# Altium PCB amps.PcbDoc
Units mm, origin at the board's own origin, x right, y up, seen from the top; angles counter-clockwise.
Board outline 153.8 x 149.61 mm, 2 copper layers (Top Layer, Bottom Layer); 97 components, 90 nets, 317 pads, 0 vias.
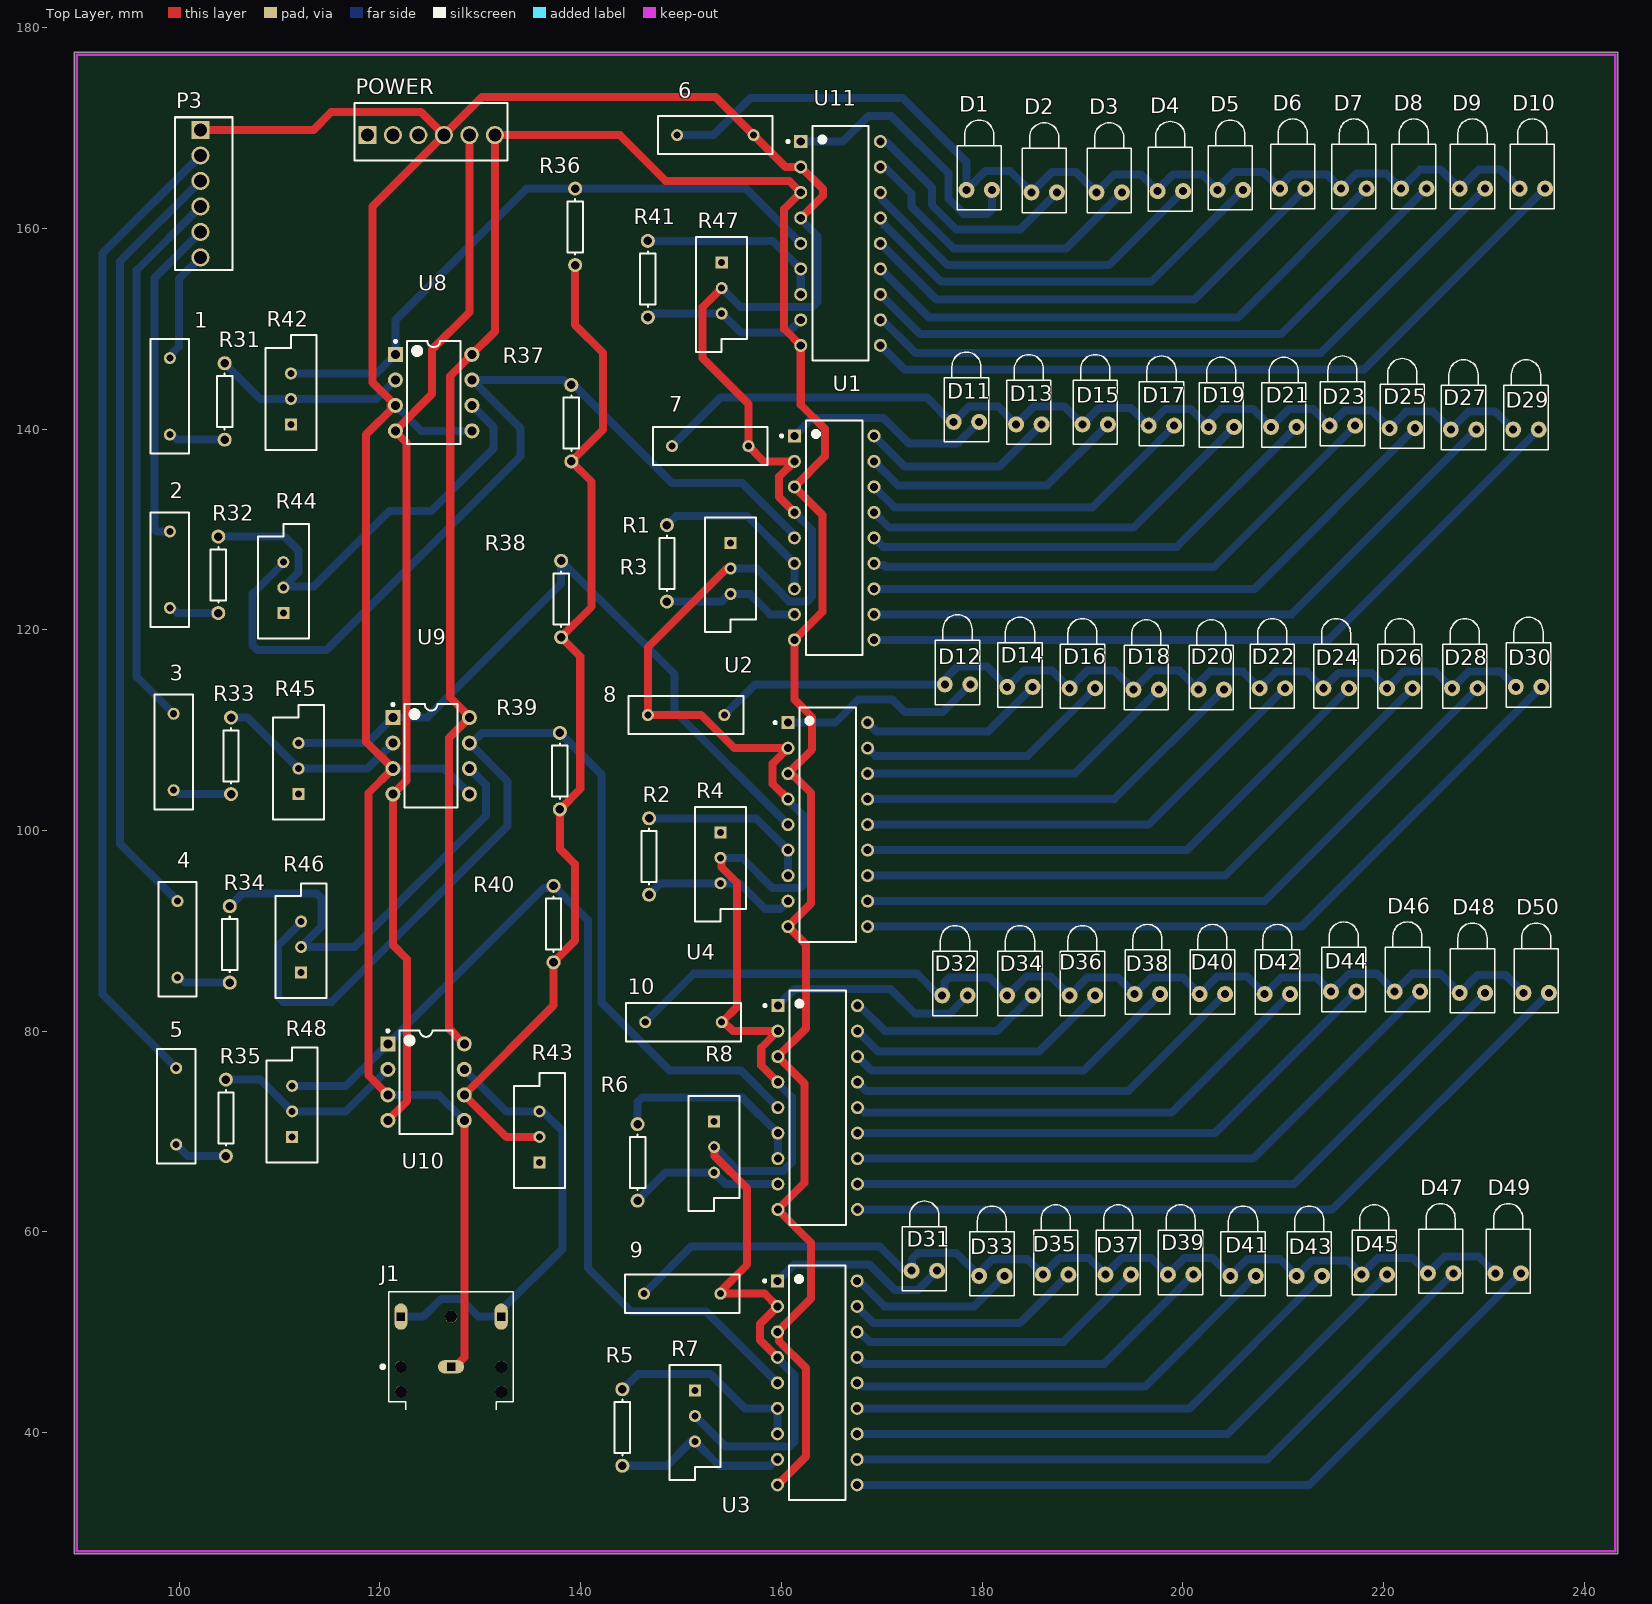
[diagram p0: Top Layer view]
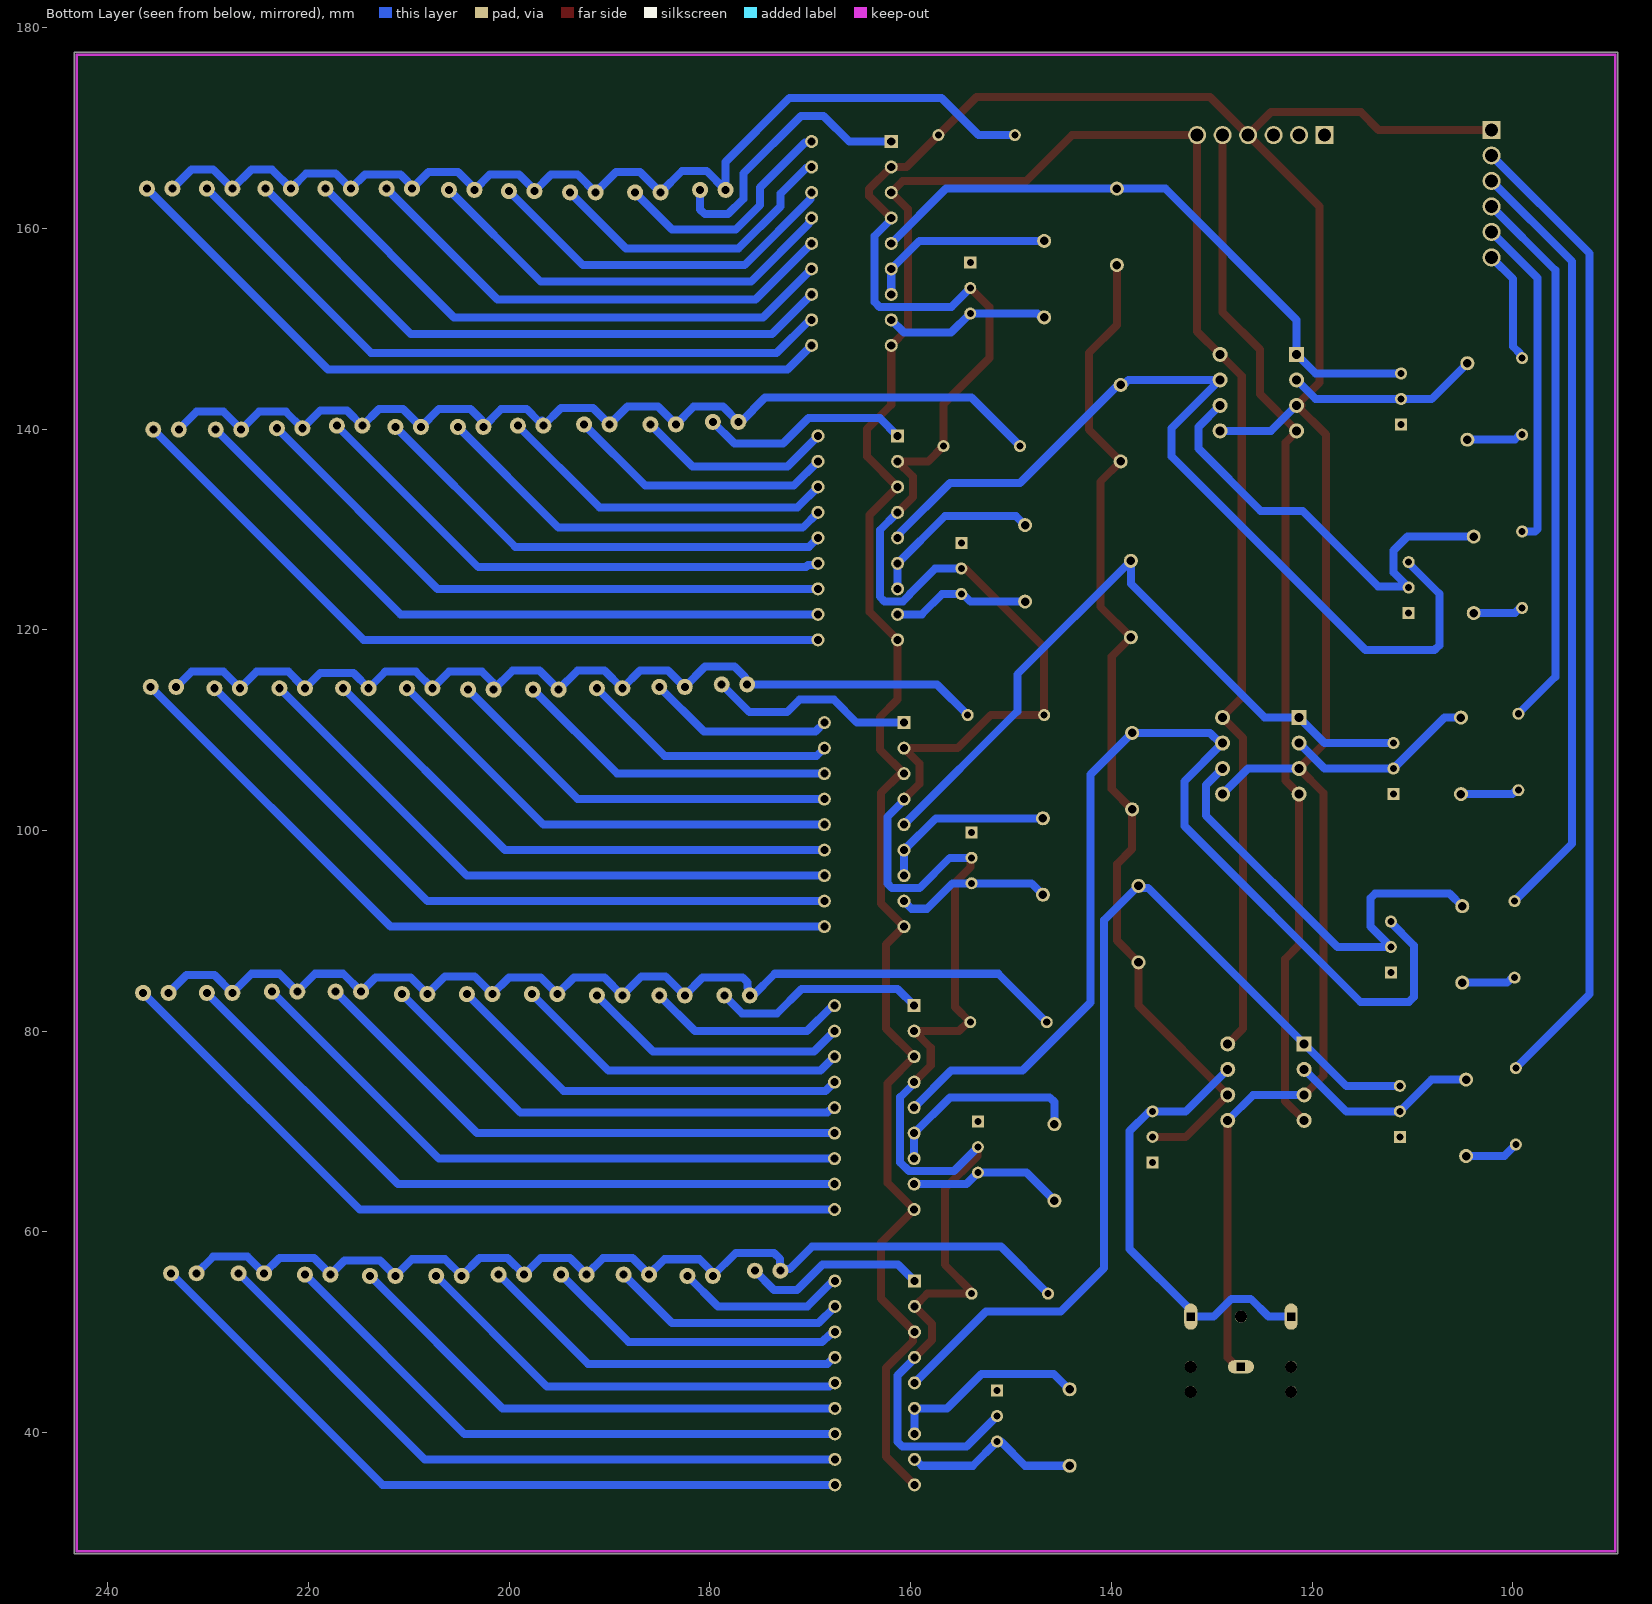
[diagram p1: Bottom Layer view, seen from below]

## Layer stack, top to bottom
Top Solder: solder mask 0.0102, Solder Resist, Dk 3.5
Top Layer: signal copper 0.0356
Dielectric 1: dielectric 0.32, FR-4, Dk 4.8
Bottom Layer: signal copper 0.0356
Bottom Solder: solder mask 0.0102, Solder Resist, Dk 3.5

## Board outline
89.535,27.94 243.332,27.94 243.332,177.546 89.535,177.546

## Design rules (kind name [scope] priority, off if disabled: settings)
BoardOutlineClearance [All] p1: gap=0.2 ignorepadtopadclearanceinfootprint=FALSE except(0.4: Arc-SplitBarrior Arc-SplitContinuation Track-SplitBarrior Track-SplitContinuation SMDPad-SplitBarrior SMDPad-SplitContinuation THPad-SplitBarrior THPad-SplitContinuation Via-SplitBarrior Via-SplitContinuation Fill-SplitBarrior Fill-SplitContinuation Poly-SplitBarrior Poly-SplitContinuation Region-SplitBarrior Region-SplitContinuation Text-SplitBarrior Text-SplitContinuation)
Clearance "Clearance Bottom Layer" [OnLayer('Bottom Layer')] p1: gap=0.203 ignorepadtopadclearanceinfootprint=TRUE except(0.254: Arc-Text Track-Text SMDPad-Text THPad-Text Via-Text Fill-Text Poly-Text Region-Text Text-Text)
Clearance "Clearance Top Layer" [OnLayer('Top Layer')] p2: gap=0.203 ignorepadtopadclearanceinfootprint=TRUE except(0.254: Arc-Text Track-Text SMDPad-Text THPad-Text Via-Text Fill-Text Poly-Text Region-Text Text-Text)
Clearance [All] p3: gap=0.2 ignorepadtopadclearanceinfootprint=FALSE except(0.089: Arc-Arc Arc-Track Arc-SMDPad Track-Track Track-SMDPad SMDPad-SMDPad; 0.127: Arc-Via Track-Via SMDPad-Via THPad-Via Via-Via; 0.254: Arc-Text Track-Text SMDPad-Text THPad-Text Via-Text Fill-Text Poly-Text Region-Text Text-Text)
HoleSize [All] p1: absolutevalues=TRUE maxlimit=6.3 minlimit=0.2 maxpercent=80.000 minpercent=20.000
MinimumAnnularRing [All] p1: minimumring=0.076
MinimumSolderMaskSliver [All] p1: minsoldermaskwidth=0.1
PolygonConnect PolygonConnect_1 [All] p1: thpad.connectstyle=Relief thpad.reliefconductorwidth=0.508 thpad.reliefentries=4 thpad.polygonreliefangle="90 Angle" thpad.airgapwidth=0.254 smdpad.connectstyle=Relief smdpad.reliefconductorwidth=0.508 smdpad.reliefentries=4 smdpad.polygonreliefangle="90 Angle" smdpad.airgapwidth=0.254 via.connectstyle=Direct via.reliefconductorwidth=0.508 via.reliefentries=4 via.polygonreliefangle="90 Angle" via.airgapwidth=0.254
RoomDefinition next [InComponentClass('next')] p1: confinementstyle=ConfineIn formatcopy=TRUE lockcomponents=FALSE outline 253.746,0 241.935,0 253.746,0
RoutingCorners [All] p1: cornerstyle=Round minsetback=2.54 maxsetback=2.54
RoutingVias [All] p1: holewidth=0.5 width=1 viastyle="Through Hole" minholewidth=0.2 minwidth=0.45 maxholewidth=1 maxwidth=2
SilkToSilkClearance [All] p1: silktosilkclearance=0.1
SilkToSolderMaskClearance [IsPad] p1: minsilkscreentomaskgap=0.1 clearancetoexposedcopper=TRUE
SolderMaskExpansion [All] p1: expansion=0.102 istentingtop=FALSE
Width [All] p1: maxlimit=1 minlimit=0.8 preferedwidth=0.9
25 further rules are at their usual default settings.

## Components (designator, comment, footprint, x,y, rotation, side; value= is the part's Value field where it differs from the comment)
1 "C1" RAD-0.3 99.06,143.256 r90 top value=10uF
2 "C1" RAD-0.3 99.06,125.984 r90 top value=10uF
3 "C1" RAD-0.3 99.441,107.823 r90 top value=10uF
4 "C1" RAD-0.3 99.822,89.154 r90 top value=10uF
5 "C1" RAD-0.3 99.695,72.517 r90 top value=10uF
6 "C1" RAD-0.3 153.416,169.291 r180 top value=100nF
7 "C1" RAD-0.3 152.908,138.303 r180 top value=100nF
8 "C1" RAD-0.3 150.495,111.506 r0 top value=100nF
9 "C1" RAD-0.3 150.114,53.848 r180 top value=100nF
10 "C1" RAD-0.3 150.241,80.899 r180 top value=100nF
D1 "LED1" LED-1 179.705,163.83 r90 top
D2 "LED1" LED-1 186.182,163.576 r90 top
D3 "LED1" LED-1 192.659,163.576 r90 top
D4 "LED1" LED-1 198.755,163.703 r90 top
D5 "LED1" LED-1 204.724,163.83 r90 top
D6 "LED1" LED-1 210.947,163.957 r90 top
D7 "LED1" LED-1 217.043,163.957 r90 top
D8 "LED1" LED-1 223.012,163.957 r90 top
D9 "LED1" LED-1 228.854,163.957 r90 top
D10 "LED1" LED-1 234.823,163.957 r90 top
D11 "LED1" LED-1 178.435,140.716 r90 top
D12 "LED1" LED-1 177.546,114.554 r90 top
D13 "LED1" LED-1 184.658,140.462 r90 top
D14 "LED1" LED-1 183.769,114.3 r90 top
D15 "LED1" LED-1 191.262,140.462 r90 top
D16 "LED1" LED-1 189.992,114.173 r90 top
D17 "LED1" LED-1 197.866,140.335 r90 top
D18 "LED1" LED-1 196.342,114.046 r90 top
D19 "LED1" LED-1 203.835,140.208 r90 top
D20 "LED1" LED-1 202.819,114.046 r90 top
D21 "LED1" LED-1 210.058,140.208 r90 top
D22 "LED1" LED-1 208.915,114.173 r90 top
D23 "LED1" LED-1 215.9,140.335 r90 top
D24 "LED1" LED-1 215.265,114.173 r90 top
D25 "LED1" LED-1 221.869,140.081 r90 top
D26 "LED1" LED-1 221.615,114.173 r90 top
D27 "LED1" LED-1 227.965,139.954 r90 top
D28 "LED1" LED-1 228.092,114.173 r90 top
D29 "LED1" LED-1 234.188,139.954 r90 top
D30 "LED1" LED-1 234.442,114.3 r90 top
D31 "LED1" LED-1 174.244,56.134 r90 top
D32 "LED1" LED-1 177.292,83.566 r90 top
D33 "LED1" LED-1 180.975,55.626 r90 top
D34 "LED1" LED-1 183.769,83.566 r90 top
D35 "LED1" LED-1 187.325,55.753 r90 top
D36 "LED1" LED-1 189.992,83.566 r90 top
D37 "LED1" LED-1 193.548,55.753 r90 top
D38 "LED1" LED-1 196.469,83.693 r90 top
D39 "LED1" LED-1 199.771,55.753 r90 top
D40 "LED1" LED-1 202.946,83.693 r90 top
D41 "LED1" LED-1 205.994,55.626 r90 top
D42 "LED1" LED-1 209.423,83.693 r90 top
D43 "LED1" LED-1 212.598,55.626 r90 top
D44 "LED1" LED-1 216.027,83.947 r90 top
D45 "LED1" LED-1 219.075,55.753 r90 top
D46 "LED1" LED-1 222.377,83.947 r90 top
D47 "LED1" LED-1 225.679,55.88 r90 top
D48 "LED1" LED-1 228.854,83.82 r90 top
D49 "LED1" LED-1 232.41,55.88 r90 top
D50 "LED1" LED-1 235.204,83.82 r90 top
J1 "SJ1-3523N" CUI_SJ1-3523N 127.08,46.562 r90 top
P3 "640456-6" TECO-640456-6_V 102.108,169.799 r270 top
POWER "640456-6" TECO-640456-6_V 118.745,169.291 r0 top
R1 "" AXIAL-0.3 148.59,126.619 r270 top value=1.21K
R2 "" AXIAL-0.3 146.812,97.409 r270 top value=1.21K
R3 "RPot" VR5 154.94,126.111 r270 top value=1K
R4 "RPot" VR5 153.924,97.282 r270 top value=1K
R5 "" AXIAL-0.3 144.145,40.513 r270 top value=1.21K
R6 "" AXIAL-0.3 145.669,66.929 r270 top value=1.21K
R7 "RPot" VR5 151.384,41.656 r270 top value=1K
R8 "RPot" VR5 153.289,68.453 r270 top value=1K
R31 "" AXIAL-0.3 104.521,142.748 r270 top value=15K
R32 "" AXIAL-0.3 103.886,125.476 r270 top value=15K
R33 "" AXIAL-0.3 105.156,107.442 r270 top value=15K
R34 "" AXIAL-0.3 105.029,88.646 r270 top value=15K
R35 "" AXIAL-0.3 104.648,71.374 r270 top value=15K
R36 "" AXIAL-0.3 139.446,160.147 r90 top value=100K
R37 "" AXIAL-0.3 139.065,140.589 r90 top value=100K
R38 "" AXIAL-0.3 138.049,123.063 r90 top value=100K
R39 "" AXIAL-0.3 137.922,105.918 r90 top value=100K
R40 "" AXIAL-0.3 137.287,90.678 r90 top value=100K
R41 "" AXIAL-0.3 146.685,154.94 r270 top value=1.21K
R42 "RPot" VR5 111.125,143.002 r90 top value=1K
R43 "RPot" VR5 135.89,69.469 r90 top value=1K
R44 "RPot" VR5 110.363,124.206 r90 top value=1K
R45 "RPot" VR5 111.887,106.172 r90 top value=1K
R46 "RPot" VR5 112.141,88.392 r90 top value=1K
R47 "RPot" VR5 154.051,154.051 r270 top value=1K
R48 "RPot" VR5 111.252,72.009 r90 top value=1K
U1 "LM3914N-1" FP-NFK0018A-MFG 165.259,129.159 r0 top
U2 "LM3914N-1" FP-NFK0018A-MFG 164.624,100.584 r0 top
U3 "LM3914N-1" FP-NFK0018A-MFG 163.576,44.958 r0 top
U4 "LM3914N-1" FP-NFK0018A-MFG 163.608,72.39 r0 top
U8 "LM4562NA" N08E 125.349,143.637 r0 top
U9 "LM4562NA" N08E 125.095,107.442 r0 top
U10 "LM4562NA" N08E 124.587,74.93 r0 top
U11 "LM3914N-1" FP-NFK0018A-MFG 165.894,158.496 r0 top

## Footprints (in the part's own frame and the unit in brackets; to place one, negate y for a bottom-side part, rotate by r counter-clockwise, add the part's x,y. Pads: shape width x height; smd on the part's side, far side on the other; paste and mask are expansions set on the pad)
AXIAL-0.3 [mm] "Axial Device, Thru-Hole; 2 Leads; 0.3 in Pin Spacing"
  round 1.4 hole 0.85: 1(-3.81,0) 2(3.81,0)
  silkscreen extent -2.77,-0.76 2.77,0.76
CUI_SJ1-3523N [mm]
  oval 1.308x2.616 hole 0.8 square: 1(0,0)
  oval 2.616x1.308 hole 0.8 square: 2(5,-5) 3(5,5)
  round 1.2 hole 1.2 unplated: ""(-2.5,5) ""(-2.5,-5) ""(0,5) ""(0,-5) ""(5,0)
  silkscreen extent -4.3,-6.2 7.5,6.97
FP-NFK0018A-MFG [mm]
  rect 1.3x1.3 hole 0.8 paste-1000 mask+0: 1(-3.969,10.16)
  round 1.3 hole 0.8 paste-1000 mask+0: 2(-3.969,7.62) 3(-3.969,5.08) 4(-3.969,2.54) 5(-3.969,0) 6(-3.969,-2.54) 7(-3.969,-5.08) 8(-3.969,-7.62) 9(-3.969,-10.16) 10(3.969,-10.16) 11(3.969,-7.62) 12(3.969,-5.08) 13(3.969,-2.54) 14(3.969,0) 15(3.969,2.54) 16(3.969,5.08) 17(3.969,7.62) 18(3.969,10.16)
  silkscreen extent -5.37,-11.68 2.8,11.68, body extent -4.72,-12.04 4.72,12.04, height 0.25
LED-1 [mm] "LED; 2 Leads"
  round 1.6 hole 0.8: 1(0,1.27) 2(0,-1.27)
  silkscreen extent -2,-2.2 6.95,2.2
N08E [mm] "DIP, 8-Pin, Row Spacing 7.62 mm, Pitch 2.54 mm"
  rect 1.5x1.5 hole 0.9: 1(-3.81,3.81)
  round 1.5 hole 0.9: 2(-3.81,1.27) 3(-3.81,-1.27) 4(-3.81,-3.81) 5(3.81,-3.81) 6(3.81,-1.27) 7(3.81,1.27) 8(3.81,3.81)
  silkscreen extent -3.93,-5.15 2.65,5.23, body extent -3.6,-5.15 3.6,5.15, height 5.33
RAD-0.3 [mm] "Radial Cap, Thru-Hole; 2 Leads; 0.3 in Pin Spacing"
  round 1.2 hole 0.7: 1(-3.81,0) 2(3.81,0)
  silkscreen extent -5.71,-1.91 5.71,1.91
TECO-640456-6_V [mm] "THD, 6-Leads, Body 15.24x5.72mm, Pitch 2.54mm"
  rect 1.8x1.8 hole 1.3: 1(0,0)
  round 1.8 hole 1.3: 2(2.54,0) 3(5.08,0) 4(7.62,0) 5(10.16,0) 6(12.7,0)
  silkscreen extent -1.27,-2.54 13.97,3.18, body extent -1.27,-2.54 13.97,3.18, height 10.03
VR5 [mm] "Thru-Hole; 3 Leads"
  rect 1.2x1.2 hole 0.7: 1(-2.54,0)
  round 1.2 hole 0.7: 2(0,0) 3(2.54,0)
  silkscreen extent -5.08,-2.54 6.35,2.54

## Part data
1 2 3 4 5 6 7 8 9 10: library part Cap, "Capacitor", LatestRevisionDate=17-Jul-2002, LatestRevisionNote="Re-released for DXP Platform.", PackageDescription="Radial Cap, Thru-Hole; 2 Leads; 0.3 in Pin Spacing", PackageReference=RAD-0.3, Published=8-Jun-2000, Publisher="Altium Limited"
D1 D2 D3 D4 D5 D6 D7 D8 D9 D10 D11 D12 D13 D14 D15 D16 D17 D18 D19 D20 D21 D22 D23 D24 D25 D26 D27 D28 D29 D30 D31 D32 D33 D34 D35 D36 D37 D38 D39 D40 D41 D42 D43 D44 D45 D46 D47 D48 D49 D50: "Typical RED GaAs LED", LatestRevisionDate=08-Jul-2005, LatestRevisionNote="Mech Layer 1 removed.", PackageDescription="LED; 2 Leads", PackageReference=LED-1, Published=8-Jun-2000, Publisher="Altium Limited"
J1: "3.5 mm Right-Angle Stereo Jack, 3 Pin PCB Mount, Non-Threaded", Package=None, Availability=Unavailable, MP=SJ1-3523N, Price=None
P3 POWER: library part CMP-2000-05661-1, "Male Header, Pitch 2.54 mm, 1 x 6 Position, Height 10.03 mm, Tail Length 3.56 mm, -55 to 105 degC, Bulk", Color=White, Current, Rating="5 /  / A", Flammability Rating=UL94V-0, Manufacturer="TE Connectivity", Package Description="Male Header, Pitch 2.54 mm, 1 x 6 Position, Height 10.03 mm, Tail Length 3.56 mm", Temperature, Operating="-55to+105 /  / °C", Voltage, Rating="250 /  / V", Agency Approvals=CSA,UL, Angle=Straight, Brand/Series=MTA-100Series, Color, Housing=White, Connector Type=MTA-100, Contact Centerline Spacing="0.100 /  / in.", Contact Mating Area Plating=Tin, Contact Plating=Tin, Contact Shape=Square, Contact Termination Area Plating=Tin, Datasheet URL=https://datasheet.ciiva.com/25618/0900766b80eb7fdd-25618163.pdf, Datasheet Version="Rev. W, 05/2005", Length, Overall="0.6 /  / \"", Length, Pin="0.14 /  / \"", Length, Terminal Post="0.14 /  / in.", Manufacturer URL=http://www.te.com/, Material, Contact=CopperAlloy, Material, Housing=Polyester, Mount Angle=Vertical, Mounting Hole Size="0.04 /  / \"", Mounting Technology=ThroughHole, Mounting Type=PCMount, Number of Contacts=6, Number of Positions=6, Number of Rows=1, Package Reference=640456-6, Pin Spacing="0.1 /  / \"", Primary Type=InterconnectSystem, Size, Post="0.025 /  / in.", Special Features=Pinstrip, Standards=RoHSCompliant,ELVCompliant,UL94V-0, Termination=Solder, Type=PCBPlug
R1 R2 R5 R6 R31 R32 R33 R34 R35 R36 R37 R38 R39 R40 R41: library part Res1, "Resistor", LatestRevisionDate=17-Jul-2002, LatestRevisionNote="Re-released for DXP Platform.", PackageDescription="Axial Device, Thru-Hole; 2 Leads; 0.3 in Pin Spacing", PackageReference=AXIAL-0.3, Published=8-Jun-2000, Publisher="Altium Limited"
R3 R4 R7 R8 R42 R43 R44 R45 R46 R47 R48: "Potentiometer", LatestRevisionDate=17-Jul-2002, LatestRevisionNote="Re-released for DXP Platform.", PackageDescription="Variable Resistor, Thru-Hole; 3 Leads", PackageReference=VR5, Published=8-Jun-2000, Publisher="Altium Limited", Set Position=0.5, Sim Note="Enter the Resistance value and the set point into parameter fields."
U1 U2 U3 U4 U11: library part CMP-0058-00006-4, "IC DRVR DOT/BAR DISPLAY 18DIP", Case/Package=DIP, Max Input Voltage=12V, Max Operating Temperature=70°C, Max Output Voltage=1.34V, Max Power Dissipation=1.365W, Max Supply Current=9.2kA, Max Supply Voltage=25V, Min Input Voltage=1.2V, Min Operating Temperature=0°C, Nominal Supply Current=9.2mA, Operating Supply Current=6.1mA, Output Current=30mA, Output Voltage=1.28V, Package Quantity=20, Height=3.3mm, Lead Free="Contains Lead", Length=22.86mm, Mount="Through Hole", Number of Channels=10, Number of Outputs=10, Number of Pins=18, Number of Segments=10, Packaging=Rail/Tube, Power Dissipation=1.365W, Radiation Hardening=No, REACH SVHC="No SVHC", RoHS Compliant=No, Series=-, Supply Current=9.2mA, Termination="Through Hole", Width=6.35mm
U8 U9 U10: library part CMP-0057-00043-2, "Dual High Performance, High Fidelity Audio Operational Amplifier, 8-pin MDIP", Manufacturer="National Semiconductor", PackageTopMarking=NSUZXYTT*LM*4562NA, PowerWise=Y, Code_JEDEC=MS-001-BA, ComponentLink1Description="LM4562 Datasheet", ComponentLink1URL=http://www.national.com/ds/LM/LM4562.pdf, ComponentLink2Description="LM4562 Web Page", ComponentLink2URL=http://www.national.com/pf/LM/LM4562.html, ComponentLink3Description="N08E Package Page", ComponentLink3URL=http://www.national.com/packaging/folders/n08e.html, CompType="Audio IC", DatasheetVersion=Jan-2010, PackageDescription="MDIP, .365 x .250 x .130in, 8 Lead, .100in Pitch", PackageReference=N08E, PackageVersion="revG, May-2006", PinCount=8, RevisionNote="Component URLs added", RoHS=Y

## Nets (pads, with @x,y where several pads share a name; then routed paths per layer and width w, separated by ;. In a path a pad name is that pad's centre, name@x,y a point inside that pad or via, vN(x,y) a via of type N, cw(c..) or ccw(c..) an arc to the next point about the centre after c; other vN are vias at no path point)
GND: 6.1 7.1 8.1 9.1 10.1 J1.1 P3.1 POWER.4 R3.2 R4.2 R7.2 R8.2 R47.2 U1.2 U1.4 U2.2 U2.4 U3.2 U3.4 U4.2 U4.4 U8.3 U8.5 U9.3 U9.5 U10.3 U10.5 U11.2 U11.4 | length 453.8
  Top Layer w0.8: P3.1 113.36,169.799 115.138,171.577 124.079,171.577 POWER.4 ; U10.3 118.872,75.565 118.872,103.759 U9.3 118.618,108.839 118.618,139.446 U8.3 121.031,142.367 121.173,142.509 121.173,142.733 119.253,144.653 119.253,162.179 POWER.4 ; J1.1 127.483,46.562 128.397,47.476 U10.5 ; U8.5@129.159,139.738 U8.5 ; R8.2 153.343,68.399 153.343,67.561 156.591,64.313 156.591,56.737 153.924,54.07 9.1 158.337,53.848 U3.2 157.861,50.832 157.861,49.244 U3.4 ; R4.2 154.001,97.205 154.001,96.923 154.006,96.917 154.006,96.362 155.575,94.793 155.575,82.423 10.1 154.273,80.899 155.162,80.01 U4.2 157.988,78.359 157.988,76.581 U4.4 ; R47.2 152.146,152.146 152.146,147.066 156.718,142.494 7.1 158.242,136.779 U1.2 159.766,135.255 159.766,133.223 U1.4 ; R3.2 154.863,126.034 154.482,126.034 146.685,118.237 8.1 152.005,111.506 155.307,108.204 U2.2 159.131,106.68 159.131,104.648 U2.4 ; U11.4 164.134,163.245 164.134,163.907 U11.2 160.401,166.116 6.1 153.416,173.101 130.175,173.101 POWER.4
  Bottom Layer w0.8: U10.3 125.857,73.66 U10.5 ; U9.3 126.365,106.172 U9.5 ; U8.3 124.079,139.827 U8.5 ; R7.2 154.415,38.625 160.821,38.625 161.29,39.093 161.29,45.705 159.607,47.388 U3.4 ; R8.2 155.685,66.057 160.158,66.057 161.036,66.935 161.036,73.423 159.639,74.82 U4.4 ; R4.2 156.088,97.282 159.119,94.251 161.837,94.251 162.306,94.719 162.306,101.363 160.655,103.014 U2.4 ; R47.2 155.939,152.163 163.085,152.163 163.576,152.654 163.576,159.258 161.925,160.909 U11.4 ; R3.2 157.544,126.111 160.037,123.618 160.037,123.56 160.771,122.826 162.599,122.826 163.068,123.294 163.068,129.921 161.417,131.572 161.29,131.572 U1.4
Net1_1: 1.1 R31.2 | length 5.7
  Bottom Layer w0.8: 1.1 99.282,139.446 99.79,138.938 R31.2
Net1_2: 1.2 P3.6 | length 11.3
  Bottom Layer w0.8: 1.2 99.06,147.174 99.26,147.374 99.26,147.52 99.949,148.209 99.949,154.94 P3.6
Net2_1: 2.1 R32.2 | length 5.2
  Bottom Layer w0.8: 2.1 99.282,122.174 99.79,121.666 R32.2 R32.2@103.886,121.793
Net2_2: 2.2 P3.5 | length 33.1
  Bottom Layer w0.8: 2.2 97.759,129.794 97.536,130.017 97.536,155.067 P3.5
Net3_1: 3.1 R33.2 | length 5.9
  Bottom Layer w0.8: 3.1 99.663,104.013 100.044,103.632 R33.2
Net3_2: 3.2 P3.4 | length 54.7
  Bottom Layer w0.8: 3.2 95.758,115.316 95.758,155.829 P3.4
Net4_1: 4.1 R34.2 | length 5.6
  Bottom Layer w0.8: 4.1 100.044,85.344 100.552,84.836 R34.2 R34.2@105.156,84.963
Net4_2: 4.2 P3.3 | length 77.4
  Bottom Layer w0.8: 4.2 94.107,98.679 94.107,156.718 P3.3
Net5_1: 5.1 R35.2 | length 5.4
  Bottom Layer w0.8: 5.1 100.838,67.564 R35.2
Net5_2: 5.2 P3.2 | length 98.1
  Bottom Layer w0.8: 5.2 99.695,76.454 99.568,76.454 92.329,83.693 92.329,157.48 P3.2
Net6_2: 6.2 D1.1 D2.1 D3.1 D4.1 D5.1 D6.1 D7.1 D8.1 D9.1 D10.1 | length 104.3
  Bottom Layer w0.8: 6.2 153.236,169.291 156.919,172.974 172.085,172.974 178.435,166.624 D1.1 180.34,165.735 182.753,165.735 D2.1 186.944,165.608 189.357,165.608 D3.1 193.167,165.354 195.834,165.354 D4.1 197.485,163.83 199.009,165.354 201.93,165.354 D5.1 203.454,163.957 205.105,165.608 208.026,165.608 D6.1 209.677,164.173 210.077,164.573 210.077,164.611 210.826,165.36 214.37,165.36 D7.1 217.297,165.481 220.218,165.481 D8.1 223.647,165.862 225.679,165.862 D9.1 229.489,165.862 231.648,165.862 D10.1
Net7_2: 7.2 D11.1 D13.1 D15.1 D17.1 D19.1 D21.1 D23.1 D25.1 D27.1 D29.1 | length 100.4
  Bottom Layer w0.8: 7.2 153.924,143.129 174.498,143.129 176.911,140.716 D11.1 178.689,142.24 181.61,142.24 D13.1 185.166,142.24 188.214,142.24 D15.1 191.643,142.113 194.818,142.113 D17.1 196.596,140.716 196.723,140.843 196.833,140.733 196.994,140.733 198.247,141.986 200.787,141.986 D19.1 202.692,140.335 202.692,140.843 203.835,141.986 207.01,141.986 D21.1 210.566,141.986 212.979,141.986 D23.1 216.154,141.859 218.821,141.859 D25.1 222.25,141.732 224.917,141.732 D27.1 226.695,140.208 226.949,140.208 228.473,141.732 231.14,141.732 D29.1
Net8_2: 8.2 D12.1 D14.1 D16.1 D18.1 D20.1 D22.1 D24.1 D26.1 D28.1 D30.1 | length 93.9
  Bottom Layer w0.8: 8.2@154.178,111.506 8.2 157.353,114.554 D12.1 176.509,114.787 176.509,115.295 177.546,116.332 180.467,116.332 D14.1 182.499,114.427 182.626,114.554 182.63,114.55 182.771,114.55 184.172,115.951 186.944,115.951 D16.1 190.5,115.951 193.167,115.951 D18.1 196.977,115.951 199.644,115.951 D20.1 201.676,114.173 201.676,114.808 202.692,115.824 205.994,115.824 D22.1 209.296,115.824 212.344,115.824 D24.1 215.519,115.697 218.821,115.697 D26.1 220.345,114.3 220.599,114.554 220.726,114.554 221.996,115.824 225.171,115.824 D28.1 228.473,115.824 231.648,115.824 D30.1
Net9_2: 9.2 D31.1 D33.1 D35.1 D37.1 D39.1 D41.1 D43.1 D45.1 D47.1 D49.1 | length 101.3
  Bottom Layer w0.8: 9.2 151.003,58.547 169.799,58.547 172.059,56.287 172.821,56.287 D31.1 173.012,56.172 173.012,57.325 173.599,57.912 177.419,57.912 D33.1 179.705,55.956 181.026,57.277 184.531,57.277 D35.1 187.706,57.404 190.627,57.404 D37.1 193.929,57.404 196.85,57.404 D39.1 200.152,57.404 202.946,57.404 D41.1 206.375,57.277 209.677,57.277 D43.1 211.328,56.007 211.709,56.007 212.852,57.15 216.408,57.15 D45.1 219.456,57.404 222.885,57.404 D47.1 226.06,57.531 229.489,57.531 D49.1
Net10_2: 10.2 D32.1 D34.1 D36.1 D38.1 D40.1 D42.1 D44.1 D46.1 D48.1 D50.1 | length 104.5
  Bottom Layer w0.8: 10.2 151.257,85.725 173.533,85.725 175.692,83.566 D32.1 176.175,83.719 176.175,84.285 176.255,84.365 176.255,84.875 176.724,85.344 180.721,85.344 D34.1 184.404,85.471 186.817,85.471 D36.1 190.5,85.344 193.548,85.344 D38.1 196.85,85.344 200.025,85.344 D40.1 201.676,83.82 201.549,83.947 201.93,83.947 203.454,85.471 206.375,85.471 D42.1 208.153,83.82 208.28,83.947 208.407,83.947 209.804,85.344 213.3,85.344 214.697,83.947 D44.1 216.535,85.725 219.329,85.725 D46.1 222.885,85.725 225.679,85.725 D48.1 229.362,85.598 232.156,85.598 D50.1
NetD1_2: D1.2 U11.1 | length 27.8
  Bottom Layer w0.8: U11.1 166.109,168.656 168.662,171.209 170.929,171.209 176.657,165.481 176.657,162.941 178.181,161.417 180.506,161.417 180.975,161.886 D1.2
NetD2_2: D2.2 U11.18 | length 23.8
  Bottom Layer w0.8: U11.18 169.958,168.56 170.53,168.56 175.006,164.084 175.006,162.306 177.419,159.893 183.769,159.893 D2.2
NetD3_2: D3.2 U11.17 | length 30.5
  Bottom Layer w0.8: U11.17 169.958,166.02 170.403,166.02 172.974,163.449 172.974,162.179 177.165,157.988 188.341,157.988 D3.2
NetD4_2: D4.2 U11.16 | length 36.5
  Bottom Layer w0.8: U11.16 169.958,163.48 169.958,162.909 176.53,156.337 192.659,156.337 D4.2
NetD5_2: D5.2 U11.15 | length 42.7
  Bottom Layer w0.8: U11.15 169.862,160.901 170.112,160.651 170.112,160.469 175.895,154.686 196.85,154.686 D5.2
NetD6_2: D6.2 U11.14 | length 49.2
  Bottom Layer w0.8: U11.14 175.451,152.908 201.168,152.908 D6.2
NetD7_2: D7.2 U11.13 | length 55.8
  Bottom Layer w0.8: U11.13 174.689,151.13 205.486,151.13 D7.2
NetD8_2: D8.2 U11.12 | length 62
  Bottom Layer w0.8: U11.12 173.799,149.479 209.804,149.479 D8.2
NetD9_2: D9.2 U11.11 | length 68.4
  Bottom Layer w0.8: U11.11 170.053,150.876 173.355,147.574 213.741,147.574 D9.2
NetD10_2: D10.2 U11.10 | length 74.7
  Bottom Layer w0.8: U11.10 172.275,145.923 218.059,145.923 D10.2
NetD11_2: D11.2 U1.1 | length 21.1
  Bottom Layer w0.8: U1.1 163.068,141.097 170.18,141.097 172.72,138.557 177.546,138.557 D11.2
NetD12_2: D12.2 U2.1 | length 20.8
  Bottom Layer w0.8: U2.1 165.354,110.744 167.64,113.03 171.069,113.03 172.311,111.788 176.05,111.788 D12.2
NetD13_2: D13.2 U1.18 | length 19.7
  Bottom Layer w0.8: U1.18 172.275,136.271 181.737,136.271 D13.2
NetD14_2: D14.2 U2.18 | length 18.7
  Bottom Layer w0.8: U2.18 169.481,109.855 180.594,109.855 D14.2
NetD15_2: D15.2 U1.17 | length 26.8
  Bottom Layer w0.8: U1.17 171.641,134.366 186.436,134.366 D15.2
NetD16_2: D16.2 U2.17 | length 25.8
  Bottom Layer w0.8: U2.17 169.355,107.442 184.531,107.442 D16.2
NetD17_2: D17.2 U1.16 | length 34.1
  Bottom Layer w0.8: U1.16 171.26,132.207 191.008,132.207 D17.2
NetD18_2: D18.2 U2.16 | length 32.5
  Bottom Layer w0.8: U2.16 189.23,105.664 D18.2
NetD19_2: D19.2 U1.15 | length 40.7
  Bottom Layer w0.8: U1.15 170.751,130.175 195.072,130.175 D19.2
NetD20_2: D20.2 U2.15 | length 40
  Bottom Layer w0.8: U2.15 193.167,103.124 D20.2
NetD21_2: D21.2 U1.14 | length 47.4
  Bottom Layer w0.8: U1.14 170.117,128.27 199.39,128.27 D21.2
NetD22_2: D22.2 U2.14 | length 47.2
  Bottom Layer w0.8: U2.14 196.596,100.584 D22.2
NetD23_2: D23.2 U1.13 | length 53.9
  Bottom Layer w0.8: U1.13 169.403,126.443 170.229,126.443 170.434,126.238 203.073,126.238 D23.2
NetD24_2: D24.2 U2.13 | length 54.6
  Bottom Layer w0.8: U2.13 200.406,98.044 D24.2
NetD25_2: D25.2 U1.12 | length 60.5
  Bottom Layer w0.8: U1.12 207.137,124.079 D25.2
NetD26_2: D26.2 U2.12 | length 62
  Bottom Layer w0.8: U2.12 204.216,95.504 D26.2
NetD27_2: D27.2 U1.11 | length 67.6
  Bottom Layer w0.8: U1.11 210.82,121.539 D27.2
NetD28_2: D28.2 U2.11 | length 69.6
  Bottom Layer w0.8: U2.11 208.153,92.964 D28.2
NetD29_2: D29.2 U1.10 | length 74.9
  Bottom Layer w0.8: U1.10 214.503,118.999 D29.2
NetD30_2: D30.2 U2.10 | length 77
  Bottom Layer w0.8: U2.10 211.836,90.424 D30.2
NetD31_2: D31.2 U3.1 | length 18.4
  Bottom Layer w0.8: U3.1 161.258,56.769 168.783,56.769 171.323,54.229 173.609,54.229 D31.2
NetD32_2: D32.2 U4.1 | length 21.3
  Bottom Layer w0.8: U4.1 161.29,84.201 170.873,84.201 173.286,81.788 176.784,81.788 D32.2
NetD33_2: D33.2 U3.18 | length 17
  Bottom Layer w0.8: U3.18 167.748,55.118 170.288,52.578 179.197,52.578 D33.2
NetD34_2: D34.2 U4.18 | length 20
  Bottom Layer w0.8: U4.18 167.576,82.486 167.64,82.423 167.907,82.423 170.32,80.01 181.483,80.01 D34.2
NetD35_2: D35.2 U3.17 | length 23.8
  Bottom Layer w0.8: U3.17 167.545,52.546 169.164,50.927 183.769,50.927 D35.2
NetD36_2: D36.2 U4.17 | length 26.8
  Bottom Layer w0.8: U4.17 169.608,77.978 185.674,77.978 D36.2
NetD37_2: D37.2 U3.16 | length 30.5
  Bottom Layer w0.8: U3.16 167.68,50.038 167.93,49.788 168.043,49.788 168.809,49.022 188.087,49.022 D37.2
NetD38_2: D38.2 U4.16 | length 33.9
  Bottom Layer w0.8: U4.16 168.974,76.073 190.119,76.073 D38.2
NetD39_2: D39.2 U3.15 | length 37.4
  Bottom Layer w0.8: U3.15 167.628,47.498 168.263,46.863 192.151,46.863 D39.2
NetD40_2: D40.2 U4.15 | length 41
  Bottom Layer w0.8: U4.15 168.465,74.041 194.564,74.041 D40.2
NetD41_2: D41.2 U3.14 | length 44.5
  Bottom Layer w0.8: U3.14 167.68,44.958 168.061,44.577 196.215,44.577 D41.2
NetD42_2: D42.2 U4.14 | length 48.2
  Bottom Layer w0.8: U4.14 167.712,72.39 167.962,72.14 168.037,72.14 168.295,71.882 198.882,71.882 D42.2
NetD43_2: D43.2 U3.13 | length 51.8
  Bottom Layer w0.8: U3.13 200.66,42.418 D43.2
NetD44_2: D44.2 U4.13 | length 55.7
  Bottom Layer w0.8: U4.13 167.64,69.85 167.767,69.723 167.894,69.85 203.2,69.85 D44.2
NetD45_2: D45.2 U3.12 | length 59.5
  Bottom Layer w0.8: U3.12 167.64,39.878 167.767,39.751 167.894,39.878 204.47,39.878 D45.2
NetD46_2: D46.2 U4.12 | length 63
  Bottom Layer w0.8: U4.12 207.01,67.31 D46.2
NetD47_2: D47.2 U3.11 | length 67.1
  Bottom Layer w0.8: U3.11 208.407,37.338 D47.2
NetD48_2: D48.2 U4.11 | length 70.4
  Bottom Layer w0.8: U4.11 211.074,64.77 D48.2
NetD49_2: D49.2 U3.10 | length 74.9
  Bottom Layer w0.8: U3.10 212.598,34.798 D49.2
NetD50_2: D50.2 U4.10 | length 77.8
  Bottom Layer w0.8: U4.10 214.884,62.23 D50.2
NetJ1_2: J1.2 J1.3 R43.3 U10.7 | length 44.8
  Bottom Layer w0.8: J1.3 124.333,51.562 126.111,53.34 128.016,53.34 129.794,51.562 J1.2 132.08,52.216 138.176,58.312 138.176,70.048 136.292,71.932 135.967,71.932 R43.3 132.588,72.009 U10.7
NetPOWER_5: POWER.5 U8.4 U9.4 U10.4 | length 103.8
  Top Layer w0.8: U10.4 122.682,73.025 122.682,87.179 121.285,88.576 U9.4 122.638,104.985 122.638,138.638 121.539,139.738 U8.4 125.193,143.481 125.193,147.926 128.905,151.638 128.905,169.164 129.032,169.291 POWER.5
NetPOWER_6: POWER.6 U1.3 U1.9 U2.3 U2.9 U3.3 U3.9 U4.3 U4.9 U8.8 U9.8 U10.8 U11.3 U11.9 | length 275.5
  Top Layer w0.8: U10.8 126.873,80.264 126.873,109.22 U9.8 128.905,111.341 127,113.246 127,145.288 128.793,147.081 128.793,147.432 128.778,147.447 U8.8 131.445,149.733 POWER.6 143.895,169.291 148.467,164.719 160.782,164.719 U11.3 160.274,161.925 160.274,149.987 U11.9 161.925,142.421 164.338,140.008 164.338,137.287 U1.3 164.084,131.445 164.084,121.793 U1.9 161.29,113.058 163.068,111.28 163.068,108.077 U2.3 160.831,105.488 161.212,105.488 162.941,103.759 162.941,92.71 U2.9 162.433,88.646 162.433,80.264 U4.3 162.306,74.803 162.306,64.897 U4.9 162.941,58.928 162.941,53.372 U3.3 159.703,49.942 159.703,49.589 159.765,49.527 159.765,49.113 162.433,46.445 162.433,37.624 U3.9
NetR1_1: R1.1 U1.6 U1.7 | length 17.6
  Bottom Layer w0.8: R1.1 149.479,131.318 156.591,131.318 U1.6 U1.7
NetR1_2: R1.2 R3.3 U1.8 | length 13.9
  Bottom Layer w0.8: R1.2 154.045,122.809 154.807,123.571 R3.3 156.845,123.571 158.877,121.539 U1.8
NetR2_1: R2.1 U2.6 U2.7 | length 17.7
  Bottom Layer w0.8: R2.1 157.48,101.219 U2.6 U2.7
NetR2_2: R2.2 R4.3 U2.8 | length 15.7
  Bottom Layer w0.8: R2.2 147.955,94.742 R4.3 155.829,94.742 158.369,92.202 159.893,92.202 U2.8
NetR5_1: R5.1 U3.6 U3.7 | length 20.1
  Bottom Layer w0.8: R5.1 144.21,44.323 145.734,45.847 152.947,45.847 156.376,42.418 U3.6 U3.7
NetR5_2: R5.2 R7.3 U3.8 | length 17.7
  Bottom Layer w0.8: R5.2 148.59,36.703 151.003,39.116 R7.3 153.797,36.703 158.889,36.703 159.524,37.338 U3.8
NetR6_1: R6.1 U4.6 U4.7 | length 20.4
  Bottom Layer w0.8: R6.1 145.669,72.937 146.138,73.406 156.083,73.406 U4.6 U4.7
NetR6_2: R6.2 R8.3 U4.8 | length 15.6
  Bottom Layer w0.8: R6.2 148.463,65.913 R8.3 154.432,64.77 U4.8
NetR31_1: R31.1 R42.2 U8.2 | length 19.6
  Bottom Layer w0.8: R31.1@104.326,146.363 R31.1 108.077,143.002 119.634,143.002 U8.2
NetR32_1: R32.1 R44.2 U8.6 | length 44.7
  Bottom Layer w0.8: R32.1 110.49,129.286 111.887,127.889 111.887,125.73 R44.2@110.445,124.288 ; R44.2 R44.2@110.445,124.288 ; U8.6 131.318,140.208 131.318,138.049 125.112,131.843 120.921,131.843 113.411,124.333 110.49,124.333 R44.2@110.445,124.288
NetR33_1: R33.1 R45.2 U9.2 | length 19.3
  Bottom Layer w0.8: R33.1 106.807,111.252 R45.2 118.745,106.172 U9.2
NetR34_1: R34.1 R46.2 U9.6 | length 44.8
  Bottom Layer w0.8: R34.1 105.036,92.456 106.306,93.726 113.704,93.726 114.173,93.257 114.173,90.424 R46.2 117.475,88.392 130.556,101.473 130.556,104.521 U9.6
NetR35_1: R35.1 R48.2 U10.2 | length 19.2
  Bottom Layer w0.8: R35.1 108.077,75.184 R48.2 116.586,72.009 U10.2
NetR36_1: R36.1 R37.1 R38.1 R39.1 R40.1 R43.2 U10.6 | length 103.3
  Top Layer w0.8: R43.2 132.588,69.469 U10.6 137.287,82.55 R40.1 139.446,89.027 139.446,96.639 137.922,98.163 R39.1 139.954,104.14 139.954,117.348 R38.1 141.097,122.301 141.097,134.747 R37.1 142.24,139.954 142.24,147.566 139.446,150.36 R36.1
NetR36_2: R36.2 R42.3 U8.1 U11.5 | length 62.7
  Bottom Layer w0.8: R42.3 119.634,145.542 U8.1 121.539,150.876 134.62,163.957 R36.2 156.464,163.957 U11.5
NetR37_2: R37.2 R44.3 U1.5 U8.7 | length 92.8
  Bottom Layer w0.8: R44.3 110.363,126.638 107.315,123.59 107.315,118.452 107.784,117.983 114.681,117.983 133.985,137.287 133.985,140.081 U8.7 138.281,144.907 138.789,144.399 R37.2 139.319,144.399 149.098,134.62 156.083,134.62 161.04,129.663 161.04,129.544 161.29,129.294 U1.5
NetR38_2: R38.2 R45.3 U2.5 U9.1 | length 70.7
  Bottom Layer w0.8: R45.3 118.745,108.712 U9.1 124.714,111.252 138.049,124.587 R38.2 149.362,115.56 149.362,111.877 U2.5
NetR39_2: R39.2 R46.3 U4.5 U9.7 | length 108.6
  Bottom Layer w0.8: R46.3 112.141,90.824 109.855,88.538 109.855,83.4 110.324,82.931 115.189,82.931 132.715,100.457 132.715,104.902 U9.7 129.159,108.712 129.159,108.739 130.148,109.728 R39.2 142.068,105.582 142.068,82.849 148.844,76.073 155.956,76.073 U4.5
NetR40_2: R40.2 R48.3 U3.5 U10.1 | length 97.4
  Bottom Layer w0.8: R48.3 116.586,74.549 U10.1 136.33,94.293 137.092,94.293 R40.2 140.716,91.059 140.716,56.388 145.034,52.07 152.495,52.07 U3.5
NetR41_1: R41.1 U11.6 U11.7 | length 18.9
  Bottom Layer w0.8: R41.1 159.131,158.75 U11.6 U11.7
NetR41_2: R41.2 R47.3 U11.8 | length 16.9
  Bottom Layer w0.8: R41.2@146.558,151.257 R41.2 146.961,151.13 147.342,151.511 R47.3 155.956,149.606 160.655,149.606 U11.8
pads on no net: J1. POWER.1 POWER.2 POWER.3 R3.1 R4.1 R7.1 R8.1 R42.1 R43.1 R44.1 R45.1 R46.1 R47.1 R48.1

## Keep-outs
Keep-Out Layer:
  lines w0.254: 89.789,28.194 89.789,177.292 243.078,177.292 243.078,28.194 89.789,28.194

## Text inside footprints (layer, text, board x,y; h text height)
J1: Mechanical 13 "PCB edge" at 121.068,34.037 h1.02 r90